# Altium PCB machkhuechdai.PcbDoc
Units mil, origin at the board's own origin, x right, y up, seen from the top; angles counter-clockwise.
Board outline 6000 x 4000 mil, 2 copper layers (Top Layer, Bottom Layer); 28 components, 19 nets, 63 pads, 0 vias.
Unrouted connection lines stored in the file: 42.
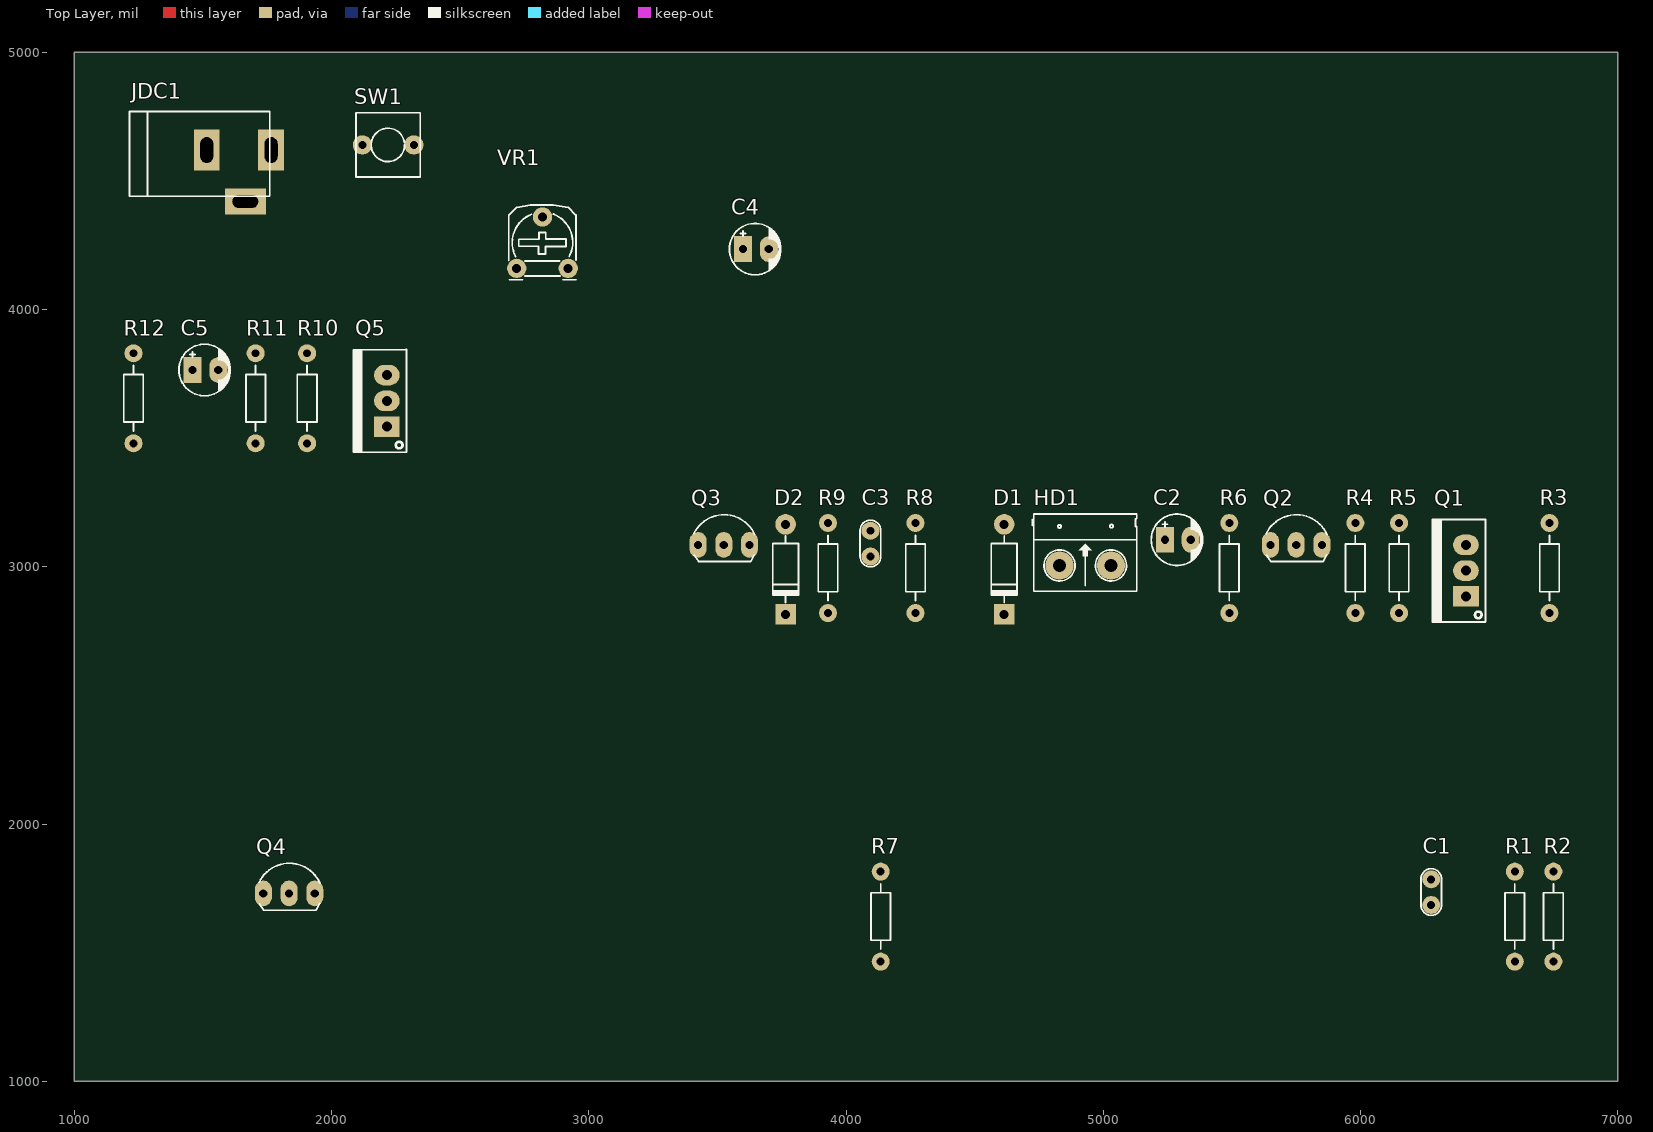
[diagram p0: Top Layer view]
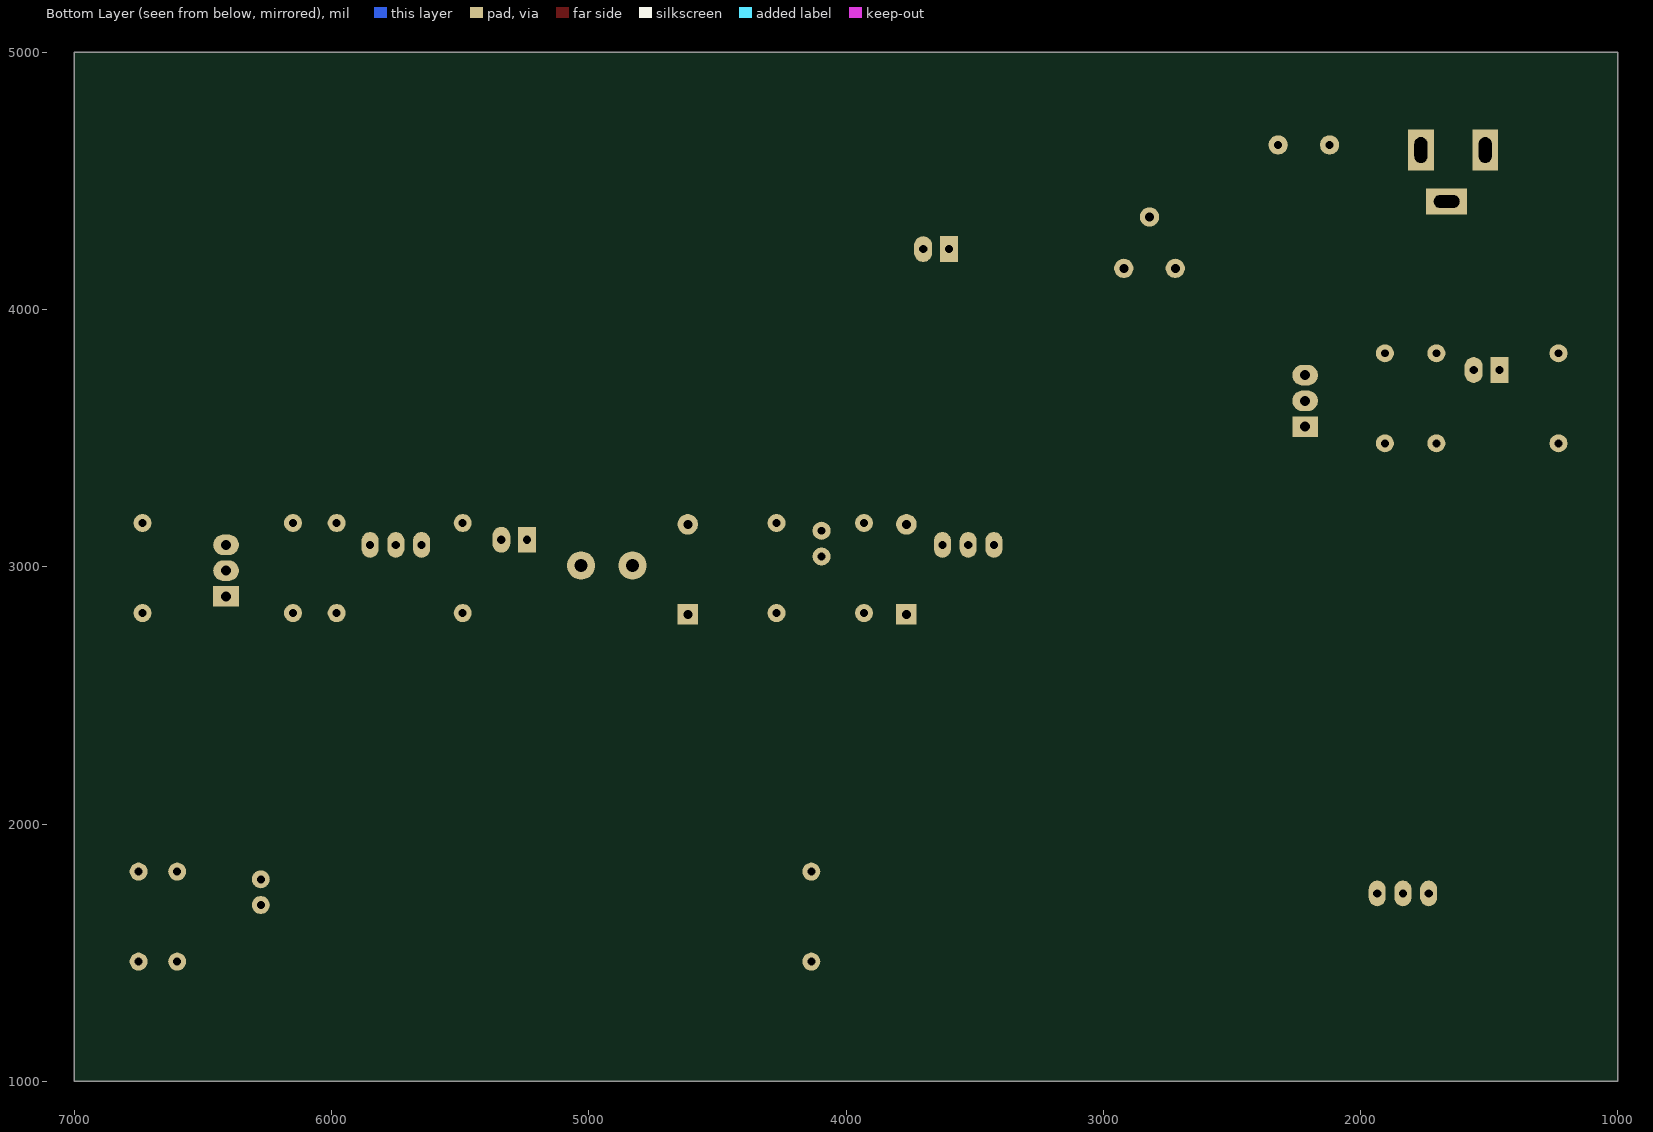
[diagram p1: Bottom Layer view, seen from below]

## Layer stack, top to bottom
Top Layer: signal copper 1.4
Dielectric: dielectric 12.6, FR-4, Dk 4.8
Bottom Layer: signal copper 1.4

## Board outline
1000,1000 7000,1000 7000,5000 1000,5000

## Design rules (kind name [scope] priority, off if disabled: settings)
Clearance [All] p1: gap=10
PolygonConnect [All] p1: connectstyle=Relief reliefconductorwidth=10 reliefentries=4 polygonreliefangle="90 Angle"
RoutingVias [All] p1: holewidth=28 width=50 viastyle="Through Hole" minholewidth=28 minwidth=50 maxholewidth=28 maxwidth=50
SilkscreenOverComponentPads [All] p1: minsilkscreentomaskgap=10
SolderMaskExpansion [All] p1: expansion=4
Width [All] p1: maxlimit=10 minlimit=10 preferedwidth=10
27 further rules are at their usual default settings.

## Components (designator, comment, footprint, x,y, rotation, side; value= is the part's Value field where it differs from the comment)
C1 "100pF" CN1 6275,1685 r90 top
C2 "10uF" CP1/2 5240,3105 r0 top
C3 "100pF" CN1 4095,3040 r90 top
C4 "10uF" CP1/2 3600,4235 r0 top
C5 "10uF" CP1/2 1460,3765 r0 top
D1 "1N4007" D1A 4615,3165 r90 top
D2 "1N4007" D1A 3765,3165 r90 top
HD1 "Header 2" HED2 4830,3005 r0 top
JDC1 "Jac DC" DC-IN 1640,4520 r0 top
Q1 "TIP41C" QTO-220 6410,2885 r90 top
Q2 "A1015" QTO-92 5750,3085 r0 top
Q3 "C1815" QTO-92 3525,3085 r0 top
Q4 "C1815" QTO-92 1835,1730 r0 top
Q5 "TIP42C" QTO-220 2215,3545 r90 top
R1 "Res1" R1/4W 6600,1465 r90 top
R2 "Res1" R1/4W 6750,1465 r90 top
R3 "Res1" R1/4W 6735,2820 r90 top
R4 "Res1" R1/4W 5980,2820 r90 top
R5 "Res1" R1/4W 6150,2820 r90 top
R6 "Res1" R1/4W 5490,2820 r90 top
R7 "Res1" R1/4W 4135,1465 r90 top
R8 "Res1" R1/4W 4270,2820 r90 top
R9 "Res1" R1/4W 3930,2820 r90 top
R10 "Res1" R1/4W 1905,3480 r90 top
R11 "Res1" R1/4W 1705,3480 r90 top
R12 "Res1" R1/4W 1230,3480 r90 top
SW1 "SW" SW2 2120,4640 r0 top
VR1 "10K" VR 2720,4160 r0 top

## Footprints (in the part's own frame and the unit in brackets; to place one, negate y for a bottom-side part, rotate by r counter-clockwise, add the part's x,y. Pads: shape width x height; smd on the part's side, far side on the other; paste and mask are expansions set on the pad)
CN1 [mil]
  round 70 hole 31: 1(0,0) 2(100,0)
  silkscreen extent -40,-40 141,40, body extent -60,-30 170,37, height 265
CP1/2 [mil] "Tu hoa < 22uF/16>50V"
  rect 70x100 hole 32: 1(0,0)
  oval 70x100 hole 32: 2(100,0)
  silkscreen extent -53,-100 147,100, body extent -49,-99 149,99, height 287
D1A [mil] "Diode 1A, W 100mil, L 350mil"
  round 80 hole 35: 1(0,0)
  rect 80x80 hole 35: 2(-350,0)
  silkscreen extent -305,-50 -45,50, body extent -386,-33 34,36, height 84
DC-IN [mil] "Jac DC input"
  rect 100x160 hole 50 slot 100 at 90 deg: 1(125,100) 2(-125,100)
  rect 160x100 hole 50 slot 100 at 0 deg: 3(25,-100)
  silkscreen extent -425,-80 120,250, body extent -410,-105 134,269, height 434
HED2 [mil] "Header 2, 2 pin, hight 300mil, Pin to Pin 200, Colour Green"
  round 110 hole 50: 1(0,0) 2(200,0)
  silkscreen extent -106,-100 300,200, body extent -92,-140 302,155, height 394
QTO-92 [mil] "TO-92"
  oval 66x100 hole 32: 1(-100,0) 2(0,0) 3(100,0)
  silkscreen extent -117,-65 120,118, body extent -109,-66 109,95, height 245
QTO-220 [mil] "TO-220 - 1-2-3"
  rect 80x100 hole 39: 1(0,0)
  oval 80x100 hole 39: 2(100,0) 3(200,0)
  silkscreen extent -100,-76 300,130, body extent -119,-64 322,121, height 755
R1/4W [mil] "R 1/4W, 2 Pin, 350mil"
  round 70 hole 31: 1(0,0) 2(350,0)
  silkscreen extent 48,-38 302,38, body extent -40,-47 386,47, height 111
SW2 [mil] "SW button 2pin, 250x 250 mil"
  round 75 hole 31: 1(0,0) 2(200,0)
  silkscreen extent -25,-125 225,125
VR [mil] "Resistor Variable"
  round 75 hole 35: 1(0,0) 2(100,200) 3(200,0)
  silkscreen extent -31,-44 231,246, body extent -87,-30 307,372, height 165

## Part data
C1 C3: library part CN1, "Cap np  1pF - 472pF"
C2 C4 C5: library part CP1, "Cap P  0,1uF < 22uF , 16 - 50V"
D1 D2: library part D1A, "Diode 1A"
HD1: library part Hed2, "Header 2 (Green)"
JDC1: library part DCIN, "Jac DC input"
Q1: "NPN 2W, BCE"
Q2: "PNP 600mW, ECB"
Q3 Q4: "NPN 600mW, ECB"
Q5: "PNP 2W, BCE"
R1 R2 R3 R4 R5 R6 R7 R8 R9 R10 R11 R12: library part Res1_1, "Resistor"
SW1: library part SW2, "Switch button 2 pin"
VR1: library part VR1, "Var Resistor"

## Nets (pads, with @x,y where several pads share a name; then routed paths per layer and width w, separated by ;. In a path a pad name is that pad's centre, name@x,y a point inside that pad or via, vN(x,y) a via of type N, cw(c..) or ccw(c..) an arc to the next point about the centre after c; other vN are vias at no path point)
GND: C1.1 C5.2 HD1.2 JDC1.2 JDC1.3 Q5.2 R1.2 R10.2 R11.2 VR1.3
NetC1_2: C1.2 R1.1 R2.2 R7.1
NetC2_1: C2.1 R6.2 R9.1 R12.2
NetC2_2: C2.2 HD1.1
NetC3_1: C3.1 D2.1 Q5.1 R10.1
NetC3_2: C3.2 D1.1 Q1.1 Q2.2
NetC4_1: C4.1 Q4.3 R7.2
NetC4_2: C4.2 VR1.2
NetC5_1: C5.1 Q3.3 R12.1
NetD1_2: D1.2 D2.2
NetJDC1_1: JDC1.1 SW1.1
NetQ1_2: Q1.2 R2.1 R3.1 R4.1 R5.1
NetQ1_3: Q1.3 R6.1
NetQ2_1: Q2.1 R3.2
NetQ2_3: Q2.3 Q4.2 R4.2
NetQ3_1: Q3.1 Q4.1 R11.1
NetQ3_2: Q3.2 R5.2
NetQ5_3: Q5.3 R9.2
NetSW1_2: SW1.2 VR1.1
pads on no net: R8.1 R8.2